# Allegro board touch_pcb.brd
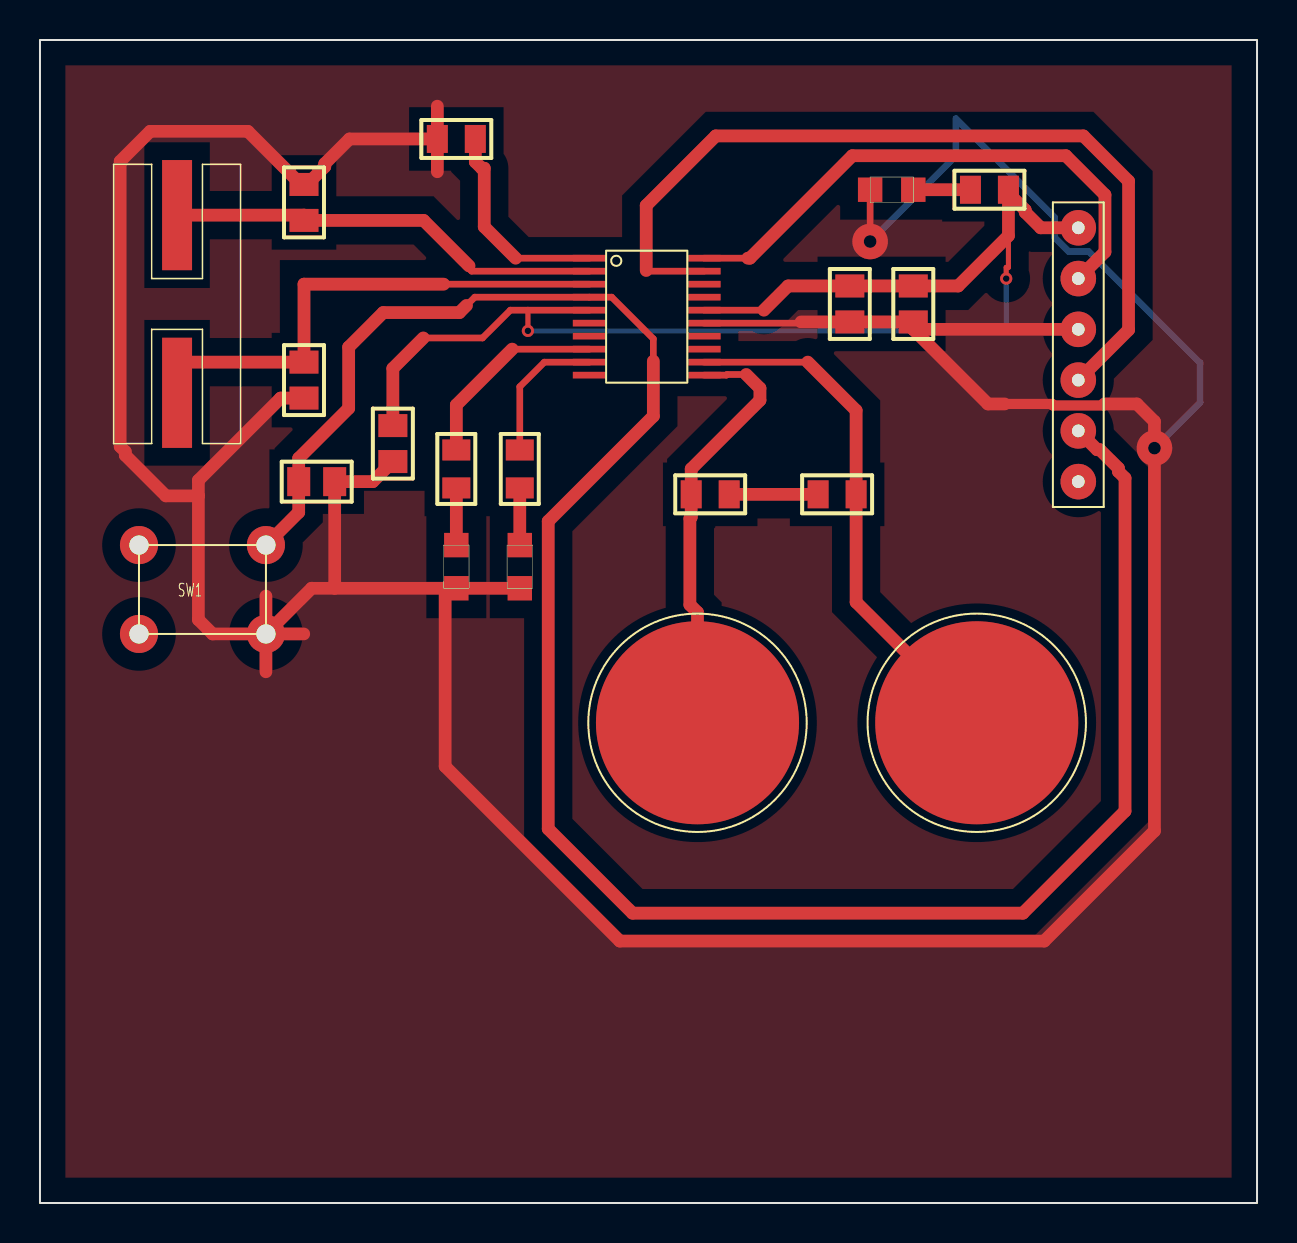
[diagram p0: board, top side]
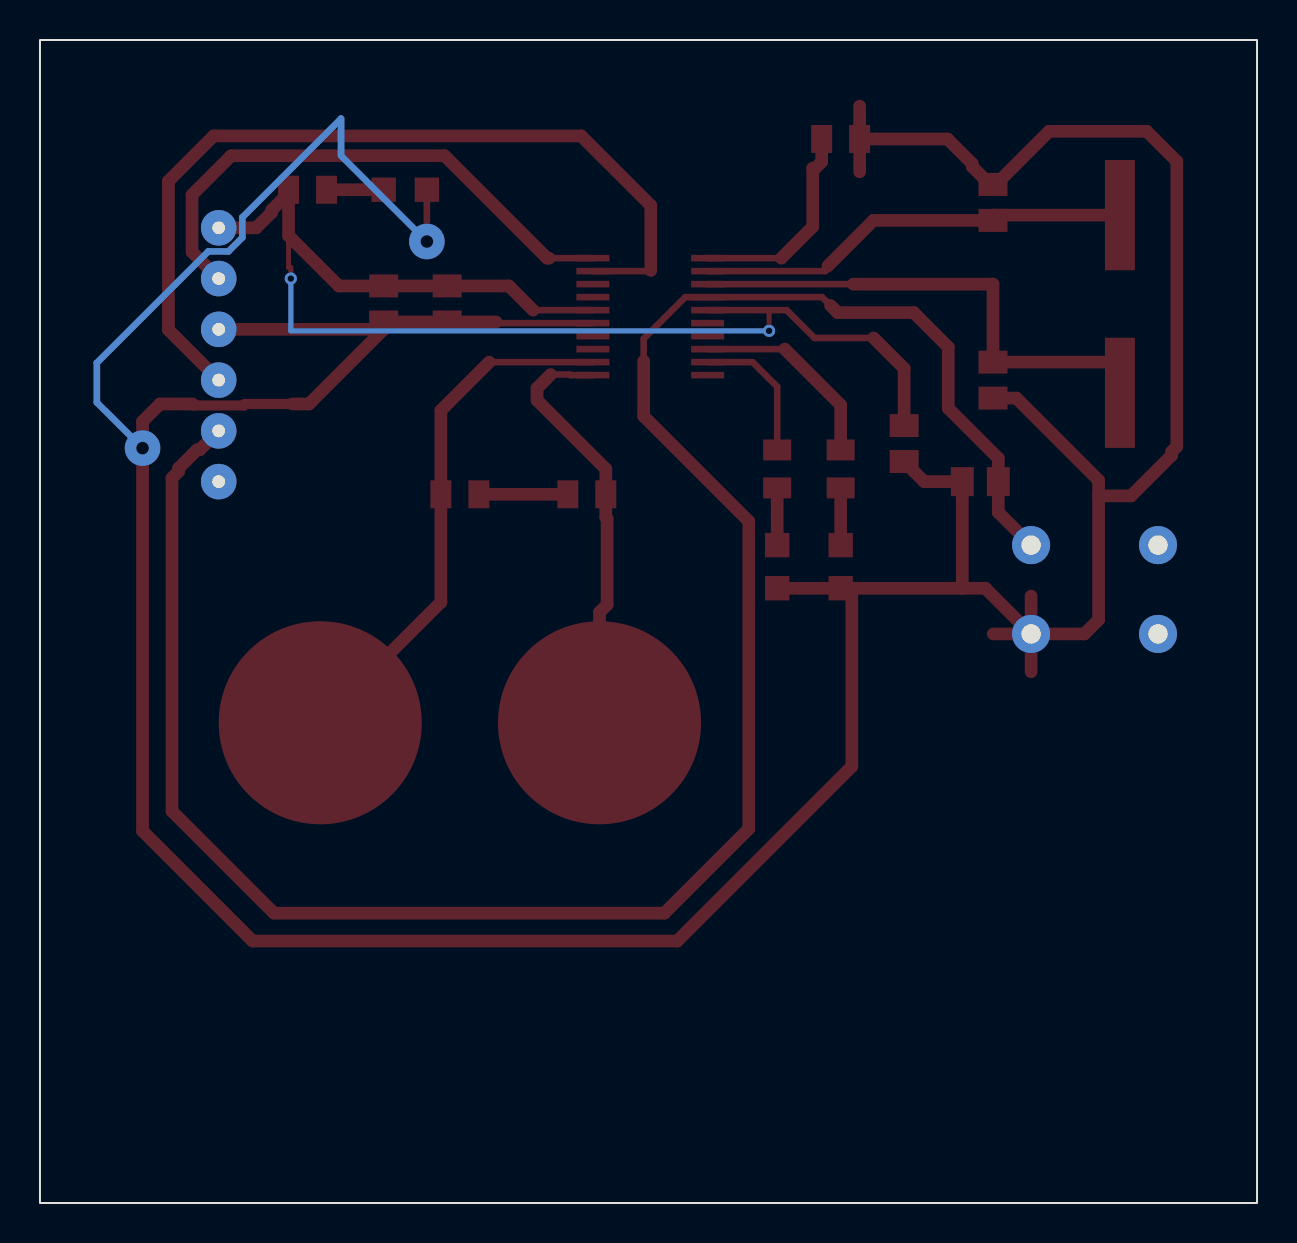
[diagram p1: board, bottom side, seen from below]

Outline 60.88 x 58.19 mm; copper layers: TOP, BOTTOM. Coordinates in mm from the lower left corner of the outline.
Outline path: rectangle 0,0 60.88,58.19

## Design rules (mm)
nets with their own width: min track width 0.254; nets GND N00340 N00400 N00412 N02909 N03452 N03499 N03939 NRST PA2 PA3 PA5 PA6 PA13-SWDIO PA14-SWCLK VCC

## Placement (name value [footprint] x y rotation side)
C1  100  [CAP_0805]  13.21 50.06 90 top
C2  100  [CAP_0805]  13.21 41.17 270 top
C3  104  [CAP_0805]  13.84 36.09 0 top
C4  103  [CAP_0805]  17.65 38 270 top
C5  104  [CAP_0805]  43.69 44.98 270 top
C6  104  [CAP_0805]  40.51 44.98 270 top
D1  LED  [LED1_SMD]  43.69 50.7 180 top
D2  LED  [LED1_SMD]  24 32.92 270 top
D3  LED  [LED1_SMD]  20.83 32.92 270 top
H1  Header6  [HEADER_6]  51.94 48.79 0 top
R1  10k  [RES_0805]  20.83 53.24 0 top
R4  4M7  [RES_0805]  33.53 35.46 0 top
R5  2M2  [RES_0805]  39.88 35.46 0 top
R12  150  [RES_0805]  47.5 50.7 180 top
R13  150  [RES_0805]  24 36.73 270 top
R14  150  [RES_0805]  20.83 36.73 270 top
SW1  SW PUSHBUTTON-SPST-2  [BUTTON_PUSH_6X6]  4.95 28.47 0 top
T1  Touch_pad_cir  [TOUCH_CIR]  32.89 24.03 0 top
T2  Touch_pad_cir  [TOUCH_CIR]  46.86 24.03 0 top
U1  STM32F030_TSSOP20  [TSSOP20]  30.35 44.35 0 top
Y1  CRYSTAL  [CRYSTAL_SMD]  6.86 40.54 90 top

## Library data of the parts
C1-C6 = C: User Part Number: PartNr
D1-D3 = LED
H1 = Header_6
R1 R4 R5 R12-R14 = R: User Part Number: PartNr
SW1 = SW PUSHBUTTON-SPST-2
T1 T2 = Touch_pad_cir
U1 = STM32F030_TSSOP20_0: Tolerance: ***; User Part Number: ***
Y1 = CRYSTAL: User Part Number: ***

## Footprints (pads in the part's own frame, mm; a bottom-side part is the same pattern mirrored in y, then rotated)
BUTTON_PUSH_6X6
  round 1.905 hole 0.965: 1(0,0) 2(6.35,0) 3(6.35,4.445) 4(0,4.445)
CAP_0805
  rect 1.15x1.45 smd: 1(-0.9,0) 2(0.9,0)
CRYSTAL_SMD
  rect 5.512x1.499 smd: 1(0,0) 2(8.89,0)
HEADER_6
  round 1.778 hole 0.635: 1(0,0) 2(0,-2.54) 3(0,-5.08) 4(0,-7.62) 5(0,-10.16) 6(0,-12.7)
LED1_SMD
  rect 1.219x1.219 smd: 1(0,0) 2(2.159,0)
RES_0805
  rect 1.05x1.4 smd: 1(-0.95,0) 2(0.95,0)
TOUCH_CIR
  round 10.16 smd: 1(0,0)
TSSOP20
  rect 1.651x0.33 smd: 1(-2.87,2.926) 2(-2.87,2.276) 3(-2.87,1.626) 4(-2.87,0.975) 5(-2.87,0.325) 6(-2.87,-0.325) 7(-2.87,-0.975) 8(-2.87,-1.626) 9(-2.87,-2.276) 10(-2.87,-2.926) 11(2.87,-2.926) 12(2.87,-2.276) 13(2.87,-1.626) 14(2.87,-0.975) 15(2.87,-0.325) 16(2.87,0.325) 17(2.87,0.975) 18(2.87,1.626) 19(2.87,2.276) 20(2.87,2.926)

## Nets
GND: C1.2 C2.2 C3.2 C4.2 C5.2 C6.2 D1.2(CATHODE) D2.2(CATHODE) D3.2(CATHODE) H1.3 R1.1 SW1.2 U1.15(VSS)
VCC: C4.1 C5.1 C6.1 H1.1 R12.1 U1.5(VDDA) U1.16(VDD)
NRST: C3.1 H1.5 SW1.3 U1.4(NRST)
PA2: R14.1 U1.8(PA2)
PA3: R13.1 U1.9(PA3)
PA5: R4.1 T1.1(OUT) U1.11(PA5)
PA6: R5.2 T2.1(OUT) U1.12(PA6)
PA13-SWDIO: H1.4 U1.19(PA13)
PA14-SWCLK: H1.2 U1.20(PA14)
N00340: R1.2 U1.1(BOOT0)
N00400: C1.1 U1.2(PF0/OSC_IN) Y1.2
N00412: C2.1 U1.3(PF1/OSC_OUT) Y1.1
N02909: R4.2 R5.1
N03452: D1.1(ANODE) R12.2
N03499: D2.1(ANODE) R13.2
N03939: D3.1(ANODE) R14.2

Pads without a net: H1 6; SW1 1 4; U1 6 7 10 13 14 17 18

## Via types
v1: diameter 1.778, hole 0.635, TOP to BOTTOM, 2 vias
v2: diameter 0.61, hole 0.33, TOP to BOTTOM, 2 vias

## Routing (per net, layer and track width the routed paths; a pad name or vN(x,y) marks a point on that pad's centre or on a via; arc(x,y) is an arc through that point)
GND: length 224.6
  TOP w0.33: U1.15 38.07,44.02 38.07,44.08 ; D1.2 v1(41.53,48.11)
  TOP w0.508: 53.25,39.98 53.21,39.94 53.21,39.9 50.67,39.9 50.67,39.94 50.63,39.98 48.26,39.98
  TOP w0.635: SW1.2 13.2,28.47 ; SW1.2 13.59,30.76 14.74,30.76 ; SW1.2 11.3,26.58 ; SW1.2 8.64,28.47 7.92,29.18 7.92,35.38 ; SW1.2 11.3,30.37 ; 48.26,39.98 47.42,39.98 43.69,43.71 ; 14.74,30.76 20.52,30.76 ; 14.74,30.76 C3.2 16.65,36.09 C4.2 ; 53.25,39.98 54.88,39.98 55.75,39.1 v1(55.75,37.77) 55.75,18.62 50.24,13.11 29.01,13.11 20.27,21.84 20.27,30.51 20.52,30.76 ; 7.92,35.38 6.3,35.38 4.27,37.41 4.27,37.6 4.01,37.85 4.01,52.12 5.51,53.62 10.4,53.62 13.06,50.96 C1.2 13.36,50.96 14.25,51.85 14.25,52 15.48,53.24 R1.1 ; 7.92,35.38 7.92,36.16 12.04,40.27 C2.2 ; 19.88,51.6 R1.1 ; R1.1 19.88,54.88 ; D2.2 D3.2 20.52,30.76 ; 43.69,43.71 C5.2 C6.2 38.07,44.08 ; 43.69,43.71 H1.3
  BOTTOM w0.33: v1(41.53,48.11) 45.82,52.4 45.82,54.25 50.76,49.31 50.76,48.3 51.45,47.61 52.46,47.61 58.04,42.04 58.04,40.06 v1(55.75,37.77)
VCC: length 67.1
  TOP w0.254: v2(48.34,46.25) 48.34,46.81 48.45,46.81 48.45,48.4 ; 24.41,44.67 v2(24.41,43.64)
  TOP w0.33: U1.5 23.53,44.67 22.14,43.28 19.18,43.28 ; 36.22,44.67 U1.16
  TOP w0.635: H1.1 50.06,48.79 49.29,49.57 49.29,49.68 48.45,50.52 ; 48.45,50.52 R12.1 ; 48.45,50.52 48.45,48.4 45.93,45.88 C5.1 C6.1 37.43,45.88 36.22,44.67 ; 19.18,43.28 17.65,41.76 C4.1
  BOTTOM w0.254: v2(24.41,43.64) 48.34,43.64 v2(48.34,46.25)
NRST: length 108.2
  TOP w0.33: 21.34,44.91 21.75,45.32 U1.4 28.6,45.32 30.68,43.24 30.68,42.12
  TOP w0.635: SW1.3 12.94,34.56 C3.1 12.94,37.26 15.44,39.76 15.44,42.82 17.17,44.55 20.98,44.55 21.34,44.91 ; 30.68,42.12 30.68,39.37 25.43,34.11 25.43,18.72 29.64,14.5 49.17,14.5 54.28,19.61 54.28,36.27 53.95,36.6 53.95,36.76 53.02,37.69 52.89,37.69 H1.5
PA2: length 10.1
  TOP w0.33: U1.8 23.62,42.72
  TOP w0.635: 23.62,42.72 20.83,39.93 R14.1
PA3: length 7.2
  TOP w0.33: U1.9 25.23,42.07 24,40.84 R13.1
PA5: length 21.4
  TOP w0.33: 35.33,41.45 34.37,41.45 34.34,41.42 U1.11
  TOP w0.635: T1.1 32.89,29.55 32.51,29.93 32.51,34.25 32.58,34.31 R4.1 32.58,36.73 36.02,40.17 36.02,40.77 35.33,41.45
PA6: length 26.7
  TOP w0.33: 38.41,42.07 U1.12
  TOP w0.635: T2.1 40.83,30.06 R5.2 40.83,39.65 38.41,42.07
PA13-SWDIO: length 43.7
  TOP w0.33: U1.19 30.35,46.62 30.33,46.64 30.33,46.66
  TOP w0.635: 30.33,46.66 30.33,49.91 33.81,53.39 52.2,53.39 54.46,51.13 54.46,43.69 H1.4
PA14-SWCLK: length 27.7
  TOP w0.33: U1.20 35.41,47.27
  TOP w0.635: H1.2 53.28,47.59 53.28,50.44 51.32,52.4 40.64,52.4 35.51,47.27 35.41,47.27
N00340: length 10.6
  TOP w0.33: U1.1 23.8,47.27
  TOP w0.635: 23.8,47.27 22.23,48.85 22.23,51.77 22.1,51.77 21.78,52.09 R1.2
N00400: length 22
  TOP w0.33: U1.2 21.6,46.62 21.46,46.76 21.46,46.89
  TOP w0.635: 21.46,46.89 19.19,49.16 C1.1 13.21,49.43 Y1.2
N00412: length 26.1
  TOP w0.33: 20.19,45.97 U1.3
  TOP w0.635: Y1.1 6.86,42.07 C2.1 13.21,45.97 20.19,45.97
N02909: length 4.5
  TOP w0.635: R4.2 R5.1
N03452: length 2.9
  TOP w0.635: D1.1 R12.2
N03499: length 2.9
  TOP w0.635: D2.1 R13.2
N03939: length 2.9
  TOP w0.635: D3.1 R14.2

## Copper pours and planes (outline as drawn; the poured copper is in the pictures)
GND on TOP: 1.27,1.27 1.27,56.92 59.61,56.92 59.61,1.27 ; 8 cut-outs
